# EAGLE board OneLedBlinker (EAGLE 7.2.0)

Size 18 x 38 mm. Coordinates in mm from the lower left corner, seen from the top.
Outline: 0,0 18,0 18,38 0,38 0,0
Copper layers (1*16): Top 0.035mm / dielectric 1.5mm / Bottom 0.035mm
Design rules "default": minimum track width 10mil, minimum drill 24mil, track to track 8mil, track to pad 8mil, pad to pad 8mil, via to via 8mil, smd to smd 8mil, copper to edge 40mil, drill to drill 8mil, minimum pad ring 10mil, minimum via ring 8mil, stop-mask expansion 4mil, vias tented up to drill 0mil, thermal gap 10mil

## Footprints (pad centres in the part's own frame; a part is rotated, then mirrored left to right if it is on the bottom)
C025-030X050 = drill 0.813 pad 1.422 octagon: 1 -1.27,0; 2 1.27,0
LED5MM = drill 0.813 pad 1.676 octagon: A -1.27,0; K 1.27,0
0207/10 = drill 0.813 pad 1.676 octagon: 1 -5.08,0; 2 5.08,0
TO92 = drill 0.813 octagon: 1 1.27,0; 2 0,1.905; 3 -1.27,0
MOLEX_480371000 = smd 1.2 x 2: 1 3.5,2.6; 2 1,2.6; 3 -1,2.6; 4 -3.5,2.6 | drill 2.5: M1 -5.7,0; M2 5.7,0 | hole 1.1: -2.25,0; 2.25,0

## Placement (x,y rotation side)
C1_10UF  [C025-030X050]  9,27 0 top
LED1  [LED5MM]  8.5,34 180 top
R2M  [0207/10]  3,15 90 top
R10K  [0207/10]  9,15 90 top
R22  [0207/10]  15,15 270 top
T1_NPN  2N3904  [TO92]  14.7,27 270 top
T2_PNP  2N3906  [TO92]  3.2,27 90 top
X1  USB-A  [MOLEX_480371000]  9,4.05 0 top

## Library data of the parts
C1_10UF LED1 R2M R10K R22 X1 = adafruit
T1_NPN = transistor
T2_PNP = transistor-pnp

## Nets
N$1: R22.2 T2_PNP.3 X1.1
N$2: C1_10UF.2 R22.1 T1_NPN.1
N$3: LED1.A T1_NPN.3
N$4: LED1.K R2M.1 X1.4
N$5: C1_10UF.1 R2M.2 T2_PNP.2
N$6: R10K.1 T2_PNP.1
N$7: R10K.2 T1_NPN.2

## Tracks (layer width: path | path; a pad name or v marks a point on that pad's centre or on a via)
N$1  (2 unrouted)
N$2  (2 unrouted)
N$3  (1 unrouted)
N$4  (2 unrouted)
N$5  (2 unrouted)
N$6  (1 unrouted)
N$7  (1 unrouted)

## Text on the board
tNames: 1 LED | Blinker | www.MadeInTheUSB.net